# Allegro board TPS54331.brd
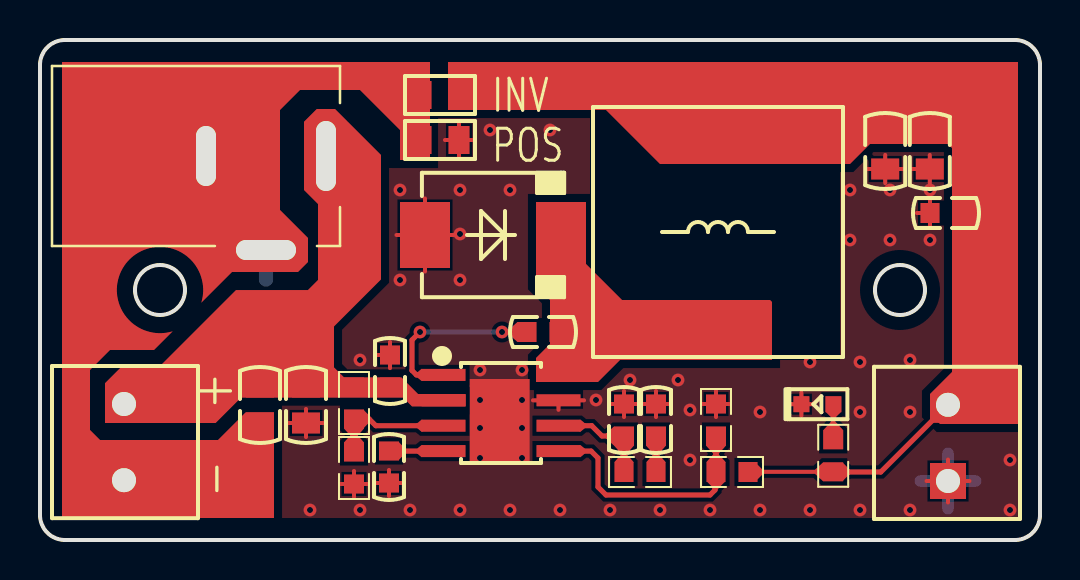
[diagram p0: board, top side]
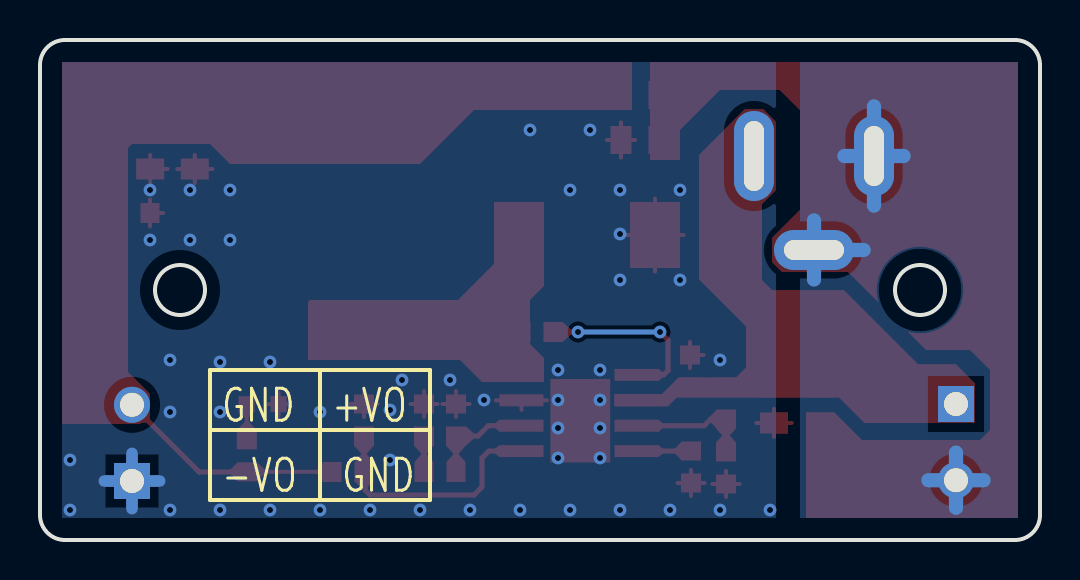
[diagram p1: board, bottom side, seen from below]

Outline 50 x 25 mm; copper layers: TOP, BOTTOM. Coordinates in mm from the lower left corner of the outline.
Outline path: 0,23.75 0,1.25 arc(0.37,0.37) 1.25,0 48.75,0 arc(49.63,0.37) 50,1.25 50,23.75 arc(49.63,24.63) 48.75,25 1.25,25 arc(0.37,24.63) 0,23.75 ; 4.75,12.5 arc(6,13.75) 7.25,12.5 arc(6,11.25) 4.75,12.5 ; 41.75,12.5 arc(43,13.75) 44.25,12.5 arc(43,11.25) 41.75,12.5

## Placement (name value [footprint] x y rotation side)
C1  22uF/25V  [CAPE0805X135N]  11 6.75 270 top
C2  22uF/25V  [CAPE0805X135N]  13.3 6.75 270 top
C3  100nF/50V  [CAPE0603X90N]  25.15 10.4 0 top
C4  22uF/25V  [CAPE0805X135N]  42.26 19.45 270 top
C5  22uF/25V  [CAPE0805X135N]  44.49 19.45 270 top
C6  100nF/50V  [CAPE0603X90N]  45.3 16.35 0 top
C7  22nF/50V  [CAPE0603X90N]  30.8 6 90 top
C8  8.2nF/50V  [CAPE0603X90N]  29.2 6 90 top
C9  8.2nF/50V  [CAPE0603X90N]  17.45 3.65 270 top
C10  100nF/50V  [CAPE0603X90N]  17.5 8.45 270 top
CN1  MKDS-1/2-3,81  [MKDS_1-2_3D81]  4.2 6.8 270 top
CN2  MKDS-1/2-3,81  [MKDS_1-2_3D81]  45.4 2.95 90 top
D1  B560C  [SMC_DO214AB]  22.65 15.25 180 top
D2  Red  [LEDE0603X80N]  38.87 6.79 0 top
J1  DC-005-20A  [CUI_PJ-002A]  11.3 17.2 180 top
L1  47uH/2.21A  [IND1260]  33.9 15.4 90 top
R1  100R/1%  [RESE0603X50AN]  30 3.4 0 top
R2  2.0K/1%  [RESE0603X50AN]  33.8 6 90 top
R3  10.5K/1%  [RESE0603X50AN]  34.6 3.4 180 top
R4  68.1K/1%  [RESE0603X50AN]  15.7 3.6 270 top
R5  332K/1%  [RESE0603X50AN]  15.7 6.85 270 top
R6  1.00K/1%  [RESE0603X50AN]  39.66 4.21 90 top
R7  0R/1%  [RESE0805X50N]  20 22.25 180 top
R8  0R/1%  [RESE0805X50N]  20 20 0 top
U1  TPS54331DDAR  [R-PDSO-G8_SOP8-EP]  23.05 6.35 270 top

## Library data of the parts
C1-C10 = CAP NP
CN1 CN2 = CON_02P
D1 = DIODE
D2 = LED_2P
J1 = DC_Jack_3P
L1 = INDUCTOR
R1-R8 = Resistor
U1 = TPS54331-9N

## Footprints (pads in the part's own frame, mm; a bottom-side part is the same pattern mirrored in y, then rotated)
CAPE0603X90N
  rect 0.95x1 smd: 1(-0.8,0) 2(0.8,0)
CAPE0805X135N
  rect 1.05x1.4 smd: 1(-0.9,0) 2(0.9,0)
CUI_PJ-002A
  oval 2x4.5 hole 1x3.5: 1(-3,-2)
  oval 2x4 hole 1x3: 2(3,-2)
  oval 4x2 hole 3x1: 3(0,2.7)
IND1260
  rect 2.9x5.4 smd: 1(-4.95,0) 2(4.95,0)
LEDE0603X80N
  rect 0.8x0.8 smd: 1(-0.8,0) 2(0.8,0)
MKDS_1-2_3D81
  rect 1.8x1.8 hole 1.2: 1(0,0)
  round 1.8 hole 1.2: 2(3.81,0)
R-PDSO-G8_SOP8-EP
  rect 0.6x2.2 smd: 1(-1.905,-2.875) 2(-0.635,-2.875) 3(0.635,-2.875) 4(1.905,-2.875) 5(1.905,2.875) 6(0.635,2.875) 7(-0.635,2.875) 8(-1.905,2.875)
  rect 3.1x2.4 smd: 9(0,0)
RESE0603X50AN
  rect 0.95x1 smd: 1(-0.8,0) 2(0.8,0)
RESE0805X50N
  rect 1.05x1.4 smd: 1(-0.95,0) 2(0.95,0)
SMC_DO214AB
  rect 2.5x3.3 smd: A(3.4,0) C(-3.4,0)

## Nets
-5V: C2.2 C4.2 C5.2 C6.1 C7.2 C8.2 C9.2 C10.1 CN2.1 D1.A D2.1(CATHODE) R2.2 R4.2 R8.2 U1.7(GND) U1.9(EP)
0: C1.2 CN1.2 J1.2 J1.3 R7.2 R8.1
VFB: R2.1 R3.2 U1.5(VSENSE)
N00223: C3.2 D1.C L1.1 U1.8(PH)
N00227: C3.1 U1.1(BOOT)
N00308: C4.1 C5.1 C6.2 CN2.2 L1.2 R3.1 R6.1 R7.1
N00617: C8.1 R1.1 U1.6(COMP)
N00624: C7.1 R1.2
N00777: C1.1 C2.1 C10.2 CN1.1 J1.1 R5.1 U1.2(VIN)
N00797: C9.1 U1.4(SS)
N01963: R4.1 R5.2 U1.3(EN)
N02987: D2.2(ANODE) R6.2

## Via types
v1: diameter 0.635, hole 0.305, TOP to BOTTOM, 51 vias

## Routing (per net, layer and track width the routed paths; a pad name or vN(x,y) marks a point on that pad's centre or on a via; arc(x,y) is an arc through that point)
-5V: length 50.8
  TOP w0.2: 20.95,19.12 R8.2 ; R8.2 20.95,20.88 ; R8.2 21.65,20 ; R8.2 20.25,20 ; C9.2 18.13,2.85 ; C9.2 17.45,2.2 ; C9.2 17.45,3.5 ; C9.2 16.77,2.85 ; D1.A 20.68,15.25 ; D1.A 19.25,13.42 ; D1.A 17.82,15.25 ; D1.A 19.25,17.08 ; 24.65,6.99 U1.7 ; U1.7 25.93,6.51 ; U1.7 27.2,6.99 ; 42.26,17.85 C4.2 ; C4.2 41.38,18.55 ; C4.2 43.14,18.55 ; C4.2 42.26,19.25 ; 33.12,6.8 R2.2 ; R2.2 33.8,6.15 ; R2.2 33.8,7.45 ; R2.2 34.48,6.8 ; 45.4,1.87 CN2.1 ; CN2.1 45.4,4.03 ; CN2.1 44.32,2.95 ; CN2.1 46.48,2.95 ; D2.1 38.65,6.79 ; D2.1 38.07,6.21 ; D2.1 37.49,6.79 ; D2.1 38.07,7.37 ; R4.2 16.38,2.8 ; R4.2 15.7,3.45 ; R4.2 15.02,2.8 ; R4.2 15.7,2.15 ; C10.1 17.5,9.9 ; C10.1 16.82,9.25 ; C10.1 17.5,8.6 ; C7.2 30.8,7.45 ; C7.2 31.48,6.8 ; C7.2 30.12,6.8 ; C7.2 30.8,6.15 ; 43.85,16.35 C6.1 ; C6.1 44.5,17.03 ; C6.1 44.5,15.67 ; C2.2 13.3,6.55 ; C2.2 12.42,5.85 ; C2.2 14.18,5.85 ; C2.2 13.3,5.15 ; 44.49,17.85 C5.2 ; C5.2 43.61,18.55 ; C5.2 44.49,19.25 ; 28.52,6.8 C8.2 ; C8.2 29.2,6.15 ; C8.2 29.88,6.8 ; C8.2 29.2,7.45
  BOTTOM w0.581: CN2.1 46.78,2.95 ; CN2.1 44.02,2.95 ; CN2.1 45.4,1.57 ; CN2.1 45.4,4.33
  vias: v1(13.5,1.5) v1(16,9) v1(16,1.5) v1(18,17.5) v1(18,13) v1(18.5,1.5) v1(21,17.5) v1(21,15.3) v1(21,13) v1(21,1.5) v1(22,8.5) v1(22,7) v1(22,5.6) v1(22,4.1) v1(22.5,20.5) v1(23.5,17.5) v1(23.5,1.5) v1(24.1,8.5) v1(24.1,7) v1(24.1,5.6) v1(24.1,4.1) v1(25.5,20.5) v1(26,1.5) v1(27.8,7) v1(28.5,1.5) v1(29.5,8) v1(31,1.5) v1(31.9,8) v1(32.5,6.5) v1(32.5,4) v1(33.5,1.5) v1(36,6.4) v1(36,1.5) v1(38.5,8.9) v1(38.5,1.5) v1(40.5,17.5) v1(40.5,15) v1(41,8.9) v1(41,6.4) v1(41,1.5) v1(42.5,17.5) v1(42.5,15) v1(43.5,9) v1(43.5,6.4) v1(43.5,1.5) v1(44.5,17.5) v1(44.5,15) v1(48.5,4) v1(48.5,1.5)
0: length 18.9
  BOTTOM w0.708: 8.82,14.5 J1.3 ; J1.3 11.3,13.02 ; J1.3 11.3,15.98 ; 8.3,16.72 J1.2 ; J1.2 9.78,19.2 ; J1.2 8.3,21.68 ; J1.2 6.82,19.2 ; 4.2,1.61 CN1.2 ; CN1.2 5.58,2.99 ; CN1.2 2.82,2.99 ; CN1.2 4.2,4.37
VFB: length 12.4
  TOP w0.254: U1.5 27.55,4.45 27.9,4.1 27.9,2.65 28.3,2.25 33.5,2.25 33.75,2.5 33.75,2.6 33.8,2.65 R3.2 R2.1
N00227: length 9.1
  TOP w0.254: v1(19,10.4) 18.6,10 18.6,8.48 18.82,8.26 20.18,8.26 ; v1(23.1,10.4) C3.1
  BOTTOM w0.254: v1(19,10.4) v1(23.1,10.4)
N00308: length 11.4
  TOP w0.2: R3.1 36.1,3.4 36.11,3.41 R6.1
  TOP w0.254: CN2.2 42.04,3.4 40.42,3.4 40.41,3.41 R6.1
N00617: length 5.3
  TOP w0.254: U1.6 27.59,5.71 28.1,5.2 C8.1 R1.1
N00624: length 1.8
  TOP w0.254: R1.2 C7.1
N00797: length 2.7
  TOP w0.254: U1.4 18.21,4.45 18.2,4.45 C9.1
N01963: length 6.3
  TOP w0.254: U1.3 16.79,5.71 16.45,6.05 R5.2 R4.1
N02987: length 1.8
  TOP w0.2: R6.2 39.66,6.15 39.67,6.16 D2.2

## Copper pours and planes (outline as drawn; the poured copper is in the pictures)
-5V on TOP (solid shape): 24.48,3.88 21.49,3.88 21.49,8.05 24.48,8.05
-5V on TOP: 48.9,1.1 1.1,1.1 1.1,23.9 48.9,23.9 ; 6 cut-outs
-5V on BOTTOM: 13.2,23.9 13.2,1.1 48.9,1.1 48.9,23.9
0 on TOP (solid shape): 19.5,19 18,19 18,20.5 16,22.5 13,22.5 12,21.5 12,16.5 13.4,15.1 13.4,13.9 12.9,13.4 9.6,13.4 8.06,11.86 4.47,14.03 6.64,10.44 5.7,9.5 3.5,9.5 2.5,8.5 2.5,5.5 3,5 8.9,5 10.28,6.38 11.7,6.38 11.7,1.1 1.1,1.1 1.1,23.9 19.5,23.9
0 on BOTTOM: 1.1,23.9 1.1,1.1 12,1.1 12,23.9
N00223 on TOP (solid shape): 27.3,13.8 29.1,12 36.5,12 36.6,11.9 36.6,9 29,9 27.9,7.9 24.8,7.9 24.8,9.1 25.5,9.8 25.5,12 24.8,12.7 24.8,16.9 27.3,16.9
N00308 on TOP (solid shape): 48.9,5.8 45,5.8 44.5,6.3 44.5,7.3 45.6,8.4 45.6,19.6 45.4,19.8 41.5,19.8 40.5,18.8 31,18.8 28.3,21.5 20.4,21.5 20.4,23.9 48.9,23.9
N00777 on TOP (solid shape): 17.05,19.25 17.05,13.03 14.7,10.68 14.7,8.63 15.2,8.13 18.07,8.13 18.9,7.3 21.27,7.3 21.28,7.29 21.28,6.68 18.6,6.68 18.16,7.12 10.05,7.12 8.78,5.85 3.25,5.85 3.25,7.84 4.21,8.79 6.1,8.79 9.8,12.5 13.4,12.5 13.9,13 13.9,16.8 13.2,17.5 13.2,20.91 13.84,21.55 14.75,21.55
VFB on TOP (solid shape): 34.3,4.72 33.88,4.25 33.8,4.23 33.72,4.25 33.3,4.72 33.8,5.23
N00227 on TOP (solid shape): 24.38,10.4 23.88,9.9 23.4,10.32 23.38,10.4 23.4,10.48 23.88,10.9
N00617 on TOP (solid shape): 29.7,4.72 29.28,4.25 29.2,4.23 29.12,4.25 28.7,4.72 29.2,5.23
N00624 on TOP (solid shape): 31.3,4.72 30.88,4.25 30.8,4.23 30.72,4.25 30.3,4.72 30.8,5.23
N01963 on TOP (solid shape): 15.62,5.35 15.7,5.37 15.78,5.35 16.2,4.88 15.7,4.37 15.2,4.88
N01963 on TOP (solid shape): 16.2,5.58 15.78,5.1 15.7,5.08 15.62,5.1 15.2,5.58 15.7,6.08

Small or netless copper shapes (teardrops, artwork), in the pictures only: 18 on TOP

## Text on the board
Board Geometry/Soldermask Bottom: 20211101 | TPS54331 EVAL BOARD | REV:A0
Ref Des/Silkscreen Bottom: GND | +VO | -VO
Ref Des/Silkscreen Top: INV | POS | + | -
NCLEGEND-1-2: FIGURE | SIZE | 0.3048 | 1.2 | 3.0x1.0 | 3.5x1.0 | DRILL CHART: TOP to BOTTOM | ALL UNITS ARE IN MILLIMETERS | PLATED | QTY | 51 | 4 | 1
